# EAGLE board v0.0 (EAGLE 5.11)
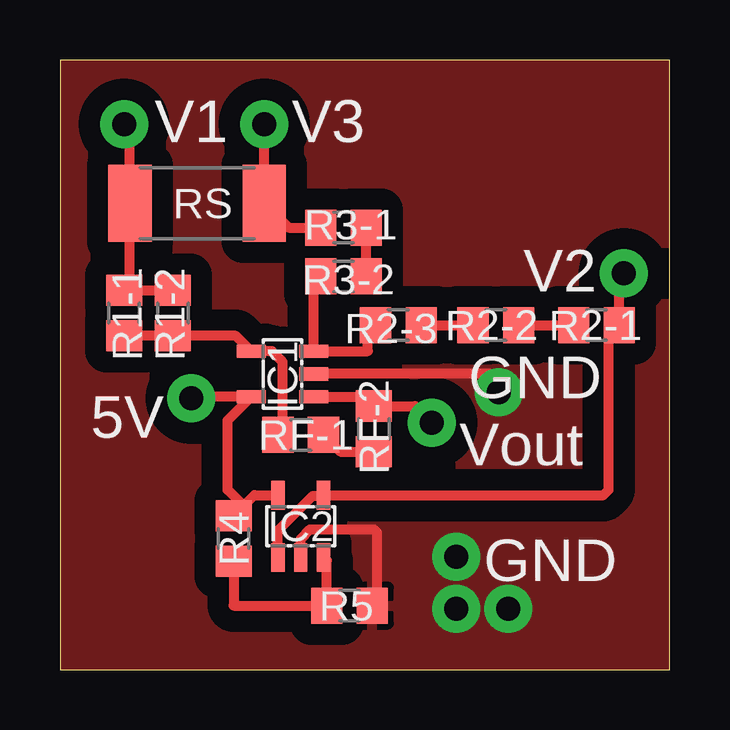
[diagram p0: board, top side]
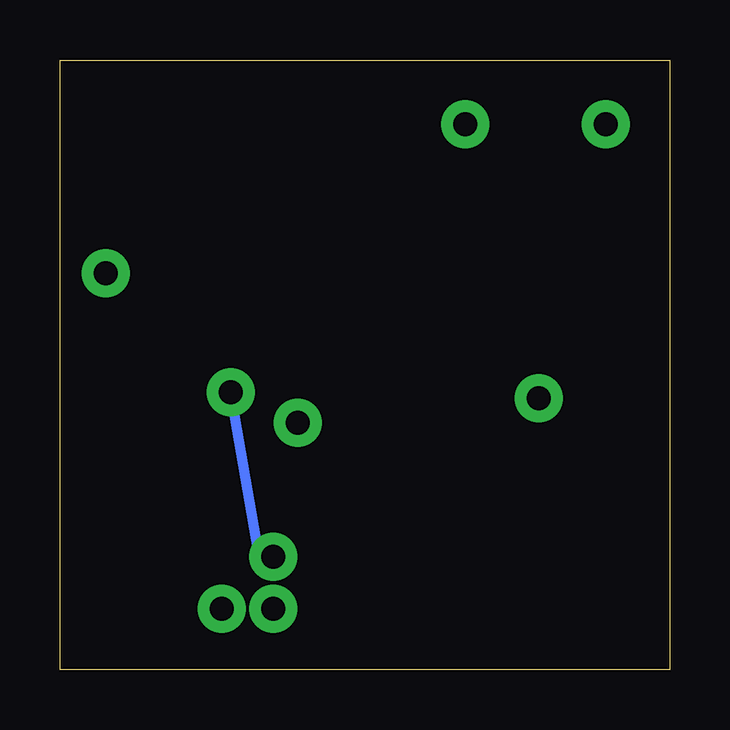
[diagram p1: board, bottom side, seen from below]

Size 25.4 x 25.4 mm. Coordinates in mm from the lower left corner, seen from the top.
Outline: 0,0 25.4,0 25.4,25.4 0,25.4 0,0
Copper layers (1*16): Top 0.035mm / dielectric 1.5mm / Bottom 0.035mm
Design rules "default *": minimum track width 10mil, minimum drill 24mil, track to track 35mil, track to pad 35mil, pad to pad 35mil, via to via 35mil, smd to smd 35mil, copper to edge 1mil, drill to drill 1mil, minimum pad ring 10mil, minimum via ring 8mil, stop-mask expansion 4mil, vias tented up to drill 0mil, thermal gap 10mil

## Footprints (pad centres in the part's own frame; a part is rotated, then mirrored left to right if it is on the bottom)
SOT-23-5L = smd 0.55 x 1.2: 1 -2.22,-1.3; 2 -1.27,-1.3; 3 -0.32,-1.3; 4 -0.32,1.3; 5 -2.22,1.3
R0805 = smd 1.3 x 1.5: 1 -0.95,0; 2 0.95,0
R2512 = smd 1.8 x 3.2: 1 -2.8,0; 2 2.8,0

## Placement (x,y rotation side)
IC1  MCP6001  [SOT-23-5L]  9.27,13.59 90 top
IC2  MCP6001  [SOT-23-5L]  11.3,5.97 0 top
R1-1  2k  [R0805]  2.67,14.86 270 top
R1-2  2k  [R0805]  4.7,14.86 270 top
R2-1  10k  [R0805]  22.35,14.35 180 top
R2-2  10k  [R0805]  18.16,14.35 180 top
R2-3  10k  [R0805]  14.1,14.35 180 top
R3-1  3k  [R0805]  11.81,18.41 0 top
R3-2  3k  [R0805]  11.81,16.38 180 top
R4  10k  [R0805]  7.24,5.46 90 top
R5  10k  [R0805]  12.06,2.67 180 top
RF-1  2k  [R0805]  10.03,9.78 0 top
RF-2  3k  [R0805]  13.08,10.03 90 top
RS  1  [R2512]  5.71,19.43 0 top

## Library data of the parts
IC1 IC2 = Alan Rosenthal
R1-1 R1-2 R2-1-R2-3 R3-1 R3-2 R4 R5 RF-1 RF-2 RS = rcl

## Nets
+5V: IC1.5 IC2.5 R4.2
N$1: IC1.3 R2-3.2 R3-2.2
N$2: RF-1.2 RF-2.1
N$3: IC2.3 R4.1 R5.2
N$4: R2-1.2 R2-2.1
N$5: R2-2.2 R2-3.1
N$6: R3-1.2 R3-2.1
N$9: IC1.4 R1-1.2 R1-2.2 RF-1.1
PE: IC1.2 IC2.2 R5.1
V1: R1-1.1 R1-2.1 RS.1
V2: IC2.1 IC2.4 R2-1.1
V3: R3-1.1 RS.2
VOUT: IC1.1 RF-2.2

## Tracks (layer width: path | path; a pad name or v marks a point on that pad's centre or on a via)
+5V  (via drill 1 pad 2)
  Top 0.406: v5.46,11.3 5.53,11.37 IC1.5 6.99,10.38 6.99,7.49 7.65,6.83 | R4.2 7.65,6.83 | 7.65,6.83 8.1,7.27 IC2.5
N$1
  Top 0.406: R3-2.2 10.57,16.09 IC1.3 12.83,13.27 12.83,14.03 R2-3.2
N$2
  Top 0.406: RF-1.2 11.68,9.08 RF-2.1
N$3
  Top 0.406: R4.1 7.24,2.67 R5.2 11.12,4.54 IC2.3
N$4
  Top 0.406: R2-2.1 R2-1.2
N$5
  Top 0.406: R2-3.1 R2-2.2
N$6
  Top 0.406: R3-2.1 R3-1.2
N$9
  Top 0.406: R1-1.2 R1-2.2 7.33,13.91 IC1.4 8.83,13.27 9.27,12.83 9.27,9.97 RF-1.1
PE  (via drill 1 pad 2)
  Top 0.406: IC2.2 10.03,5.46 10.41,5.84 13.08,5.84 13.21,5.71 13.21,2.86 R5.1 | IC1.2 17.91,12.32 v18.29,11.56
  Bottom 0.406: v18.29,11.56 17.14,4.95 v16.51,4.7
  other vias: 16.51,2.54 18.67,2.54
  pour Top: -1.4,-1.27 26.29,-1.52 26.67,26.29 -1.4,27.43
V1  (via drill 1 pad 2)
  Top 0.406: R1-2.1 R1-1.1 2.92,16.06 RS.1 2.92,22.48 v2.67,22.73
V2  (via drill 1 pad 2)
  Top 0.406: v23.5,16.51 23.3,16.32 R2-1.1 22.86,13.91 22.86,7.49 22.64,7.27 IC2.4 10.95,7.24 10.54,7.24 9.08,5.78 IC2.1
V3  (via drill 1 pad 2)
  Top 0.406: R3-1.1 9.53,18.41 RS.2 v8.52,22.73 v8.51,22.73
VOUT  (via drill 1 pad 2)
  Top 0.406: IC1.1 12.7,11.37 RF-2.2 14.8,10.98 v15.49,10.29

## Text on the board
tNames: V1 | V3 | V2 | GND | 5V | Vout | GND